# EAGLE board SparkFun_MOSFET_Power_Switch_and_Buck_Regulator_Low-Side-Panel (EAGLE 9.6.2), part 1 of 3
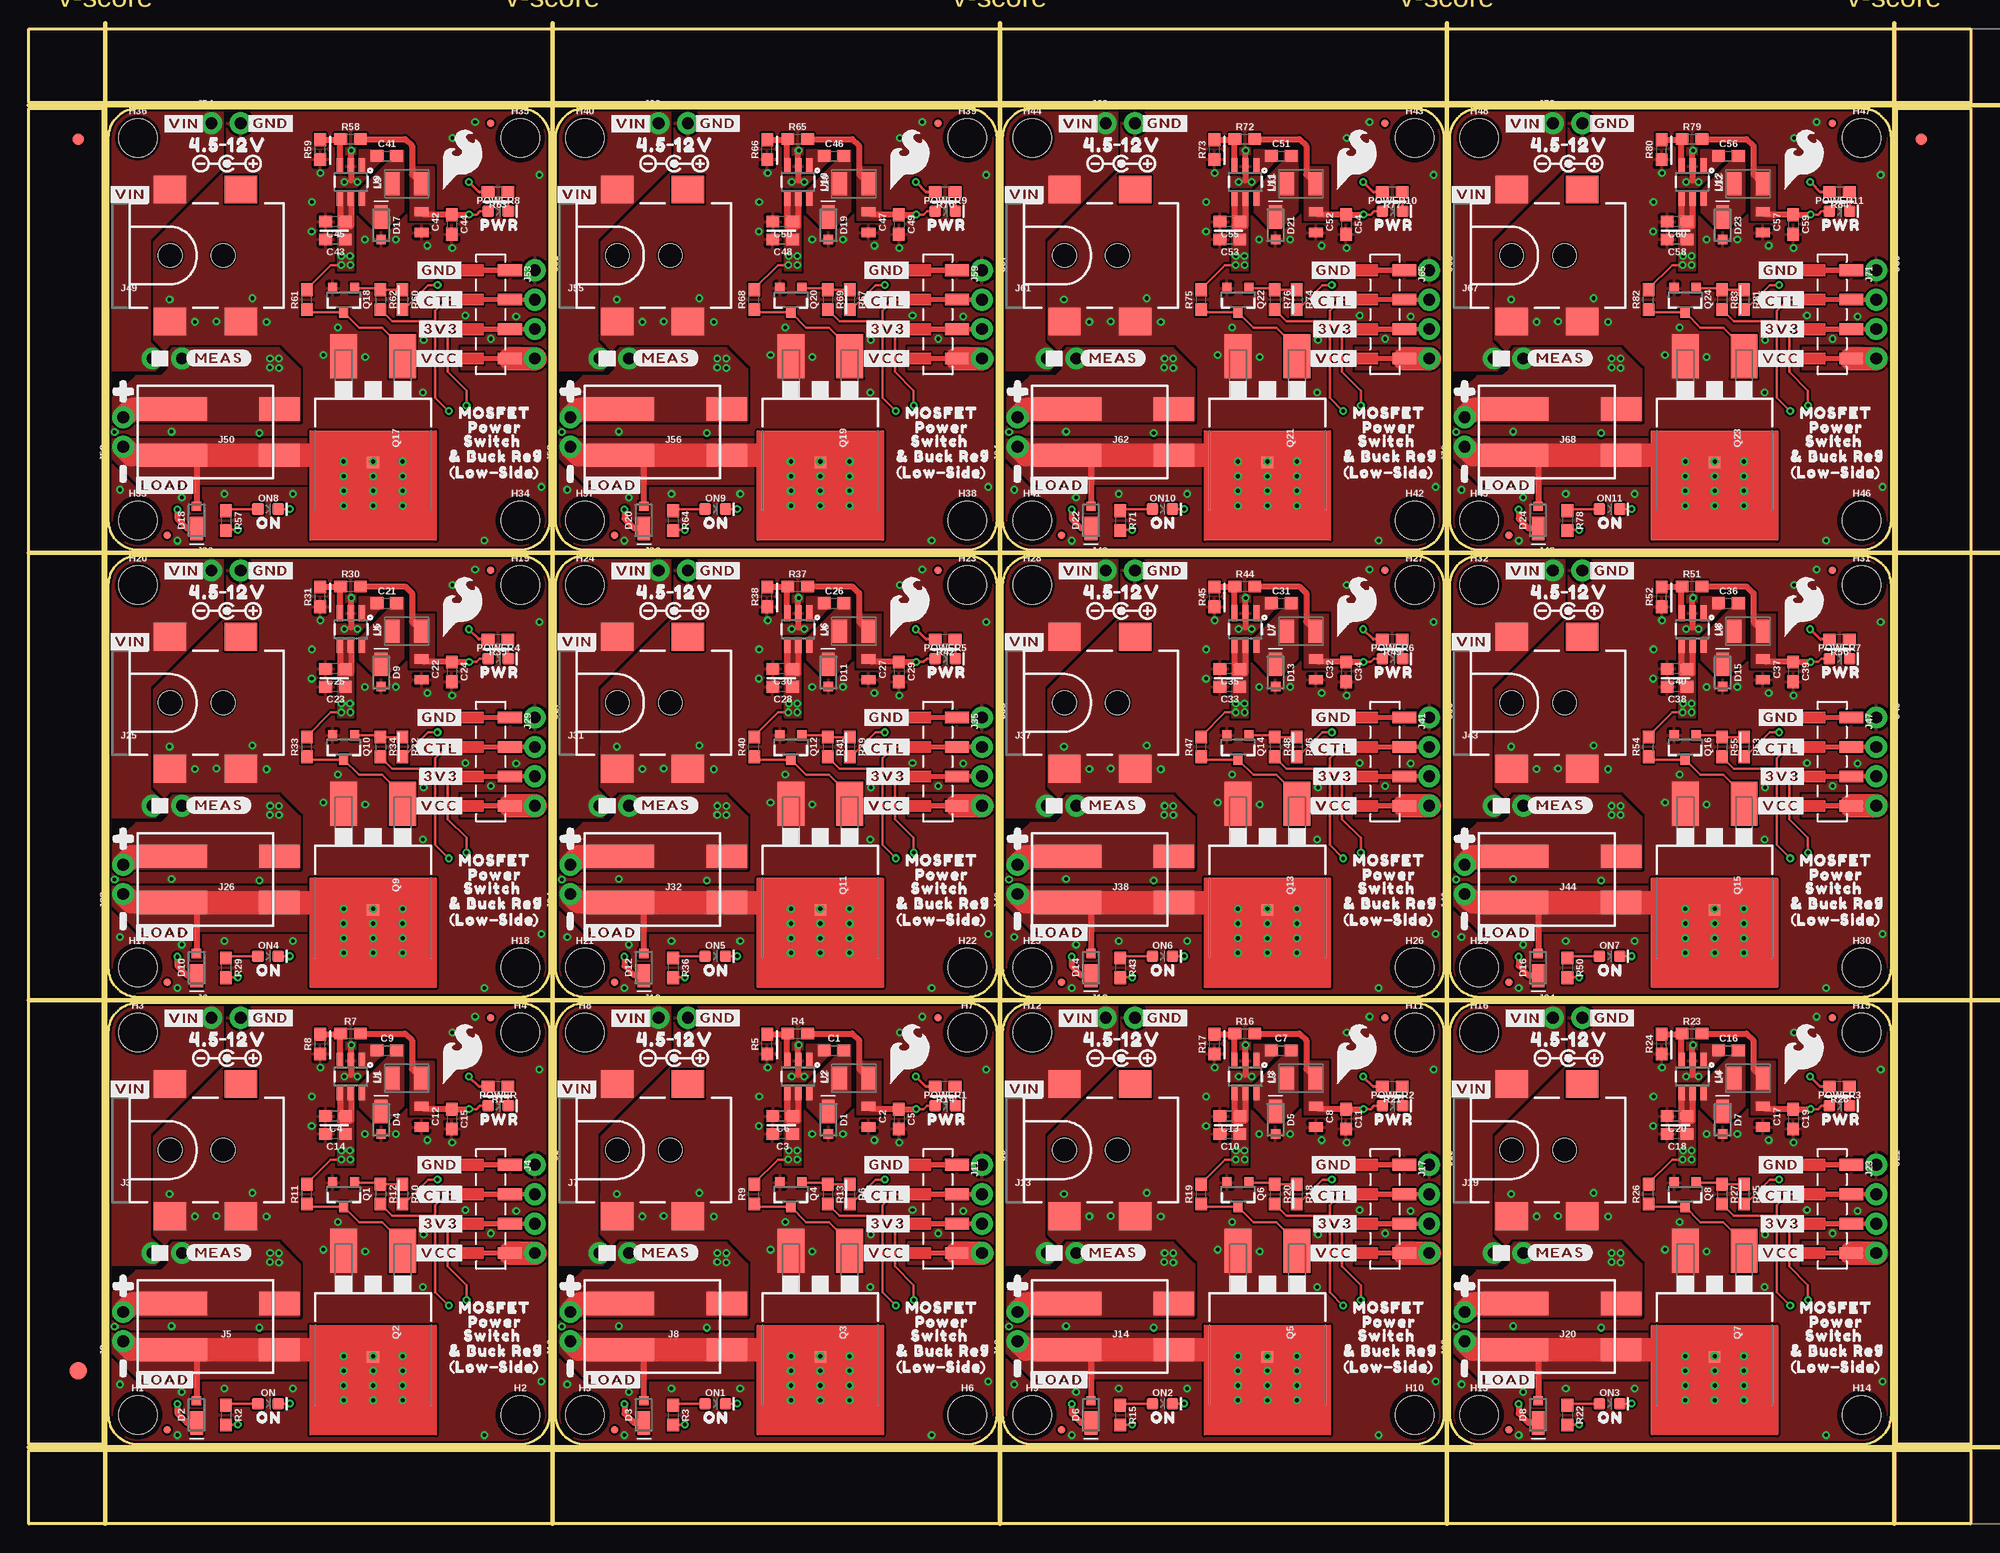
[diagram p0: board, top side]
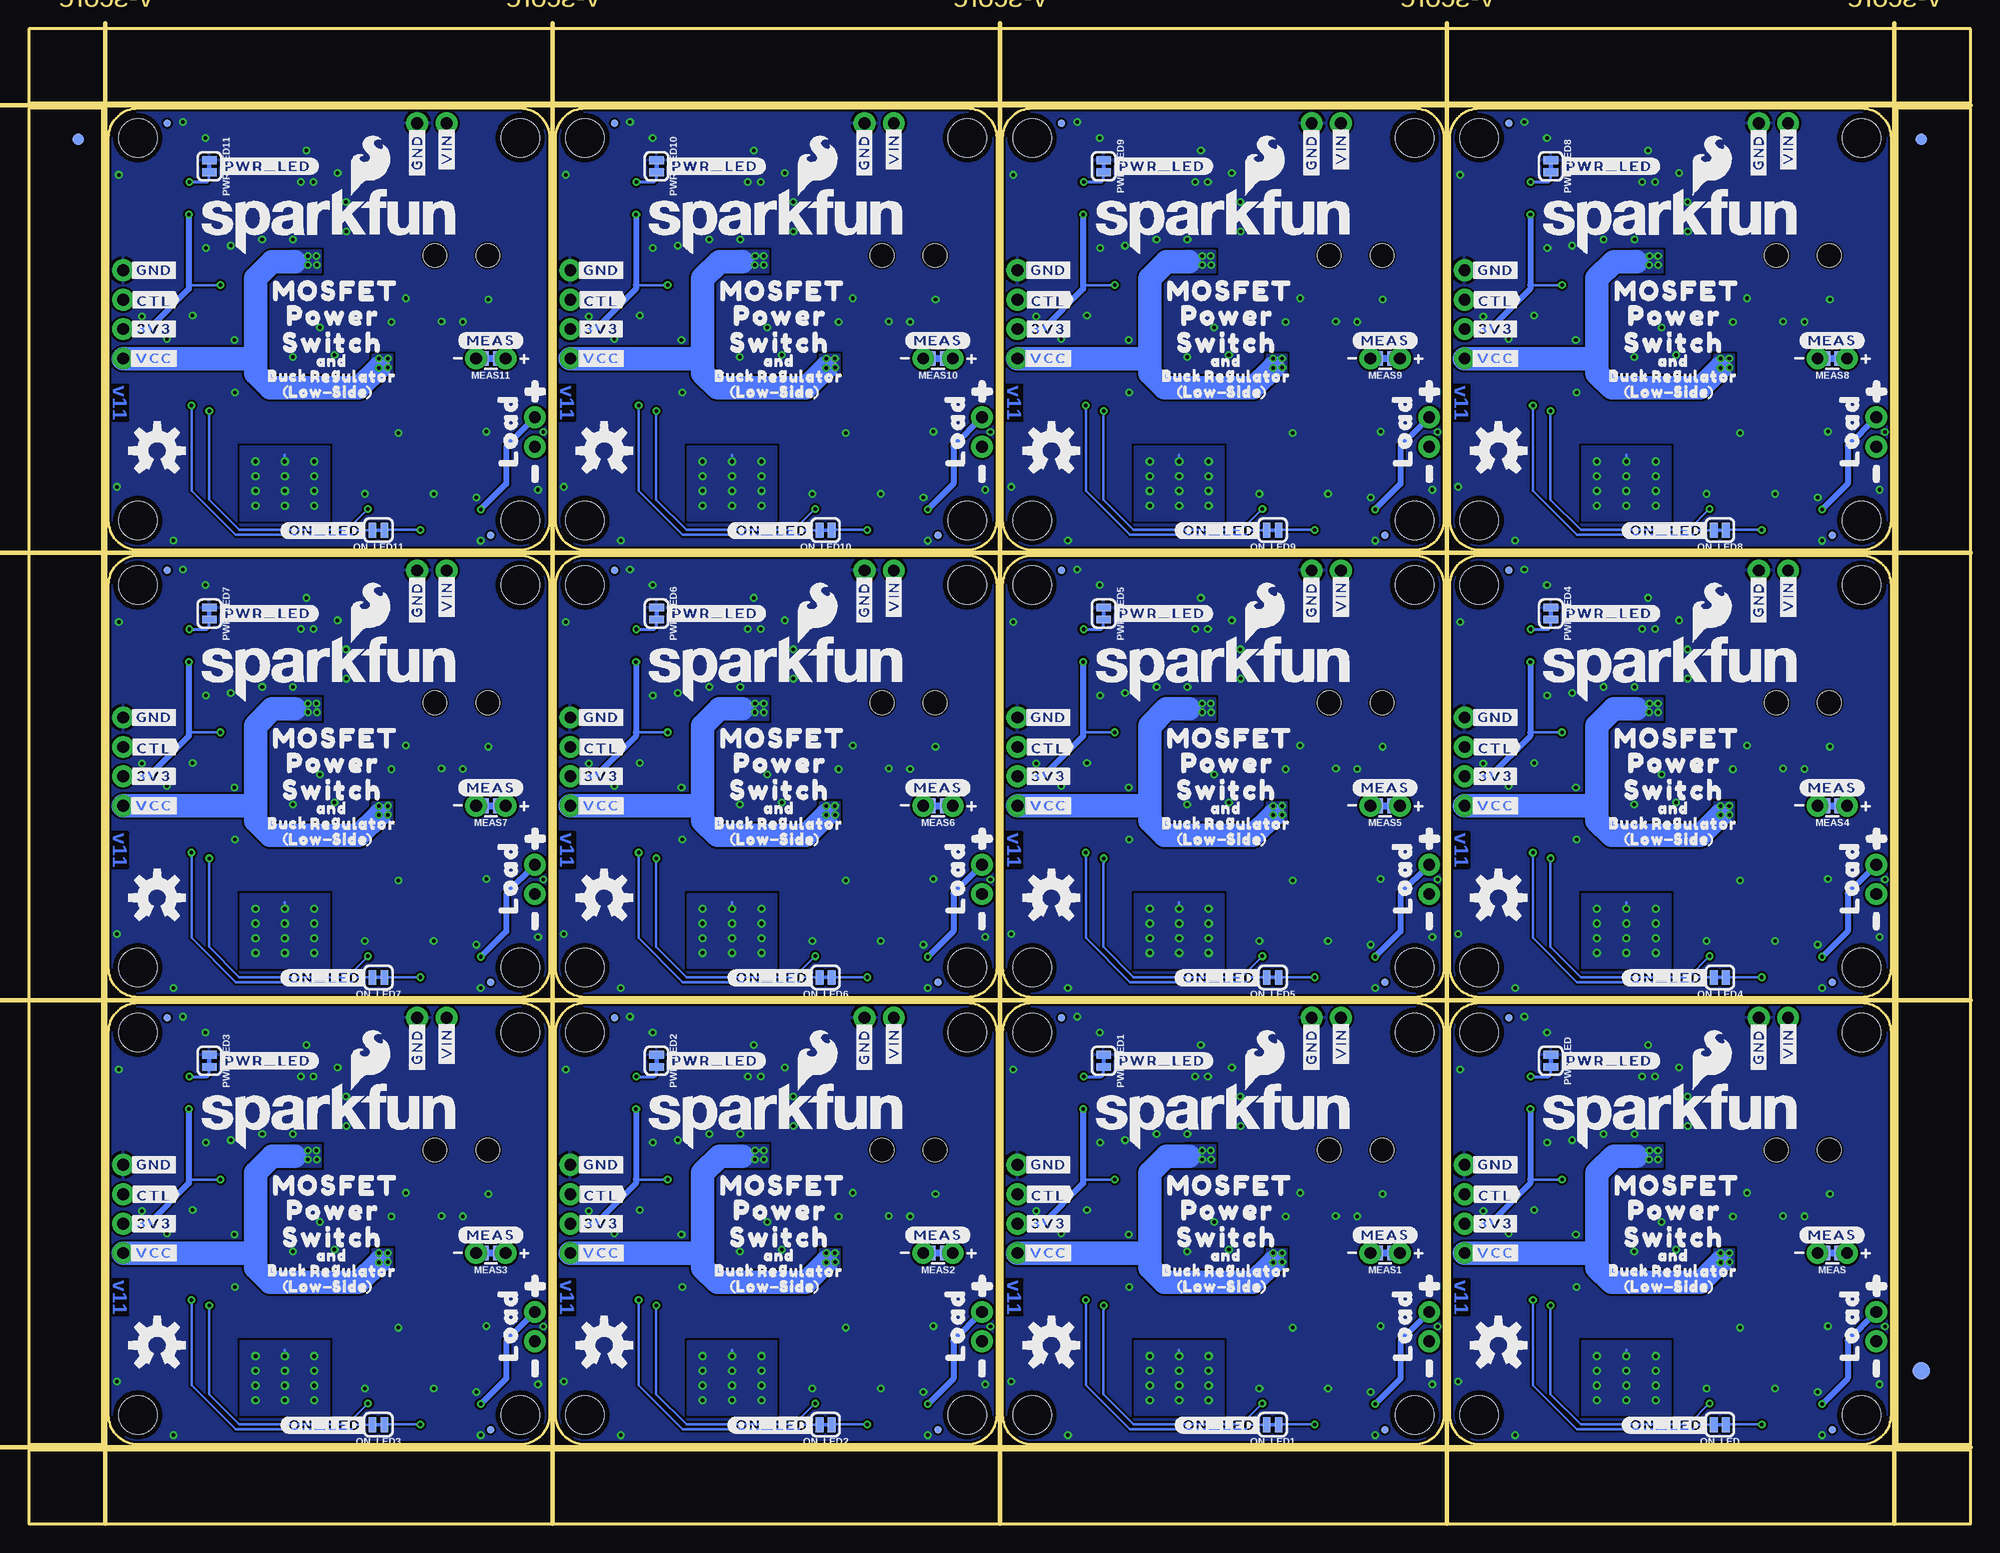
[diagram p1: board, bottom side, seen from below]

Size 167.64 x 129.03 mm. Coordinates in mm from the lower left corner, seen from the top.
Outline: 6.86,9.4 6.86,42.42 arc-90 9.4,44.96 42.42,44.96 arc-90 44.96,42.42 44.96,9.4 arc-90 42.42,6.86 9.4,6.86 arc-90 6.86,9.4
Outline: 45.47,9.4 45.47,42.42 arc-90 48.01,44.96 81.03,44.96 arc-90 83.57,42.42 83.57,9.4 arc-90 81.03,6.86 48.01,6.86 arc-90 45.47,9.4
Outline: 84.07,9.4 84.07,42.42 arc-90 86.61,44.96 119.63,44.96 arc-90 122.17,42.42 122.17,9.4 arc-90 119.63,6.86 86.61,6.86 arc-90 84.07,9.4
Outline: 122.68,9.4 122.68,42.42 arc-90 125.22,44.96 158.24,44.96 arc-90 160.78,42.42 160.78,9.4 arc-90 158.24,6.86 125.22,6.86 arc-90 122.68,9.4
Outline: 6.86,48.01 6.86,81.03 arc-90 9.4,83.57 42.42,83.57 arc-90 44.96,81.03 44.96,48.01 arc-90 42.42,45.47 9.4,45.47 arc-90 6.86,48.01
Outline: 45.47,48.01 45.47,81.03 arc-90 48.01,83.57 81.03,83.57 arc-90 83.57,81.03 83.57,48.01 arc-90 81.03,45.47 48.01,45.47 arc-90 45.47,48.01
Outline: 84.07,48.01 84.07,81.03 arc-90 86.61,83.57 119.63,83.57 arc-90 122.17,81.03 122.17,48.01 arc-90 119.63,45.47 86.61,45.47 arc-90 84.07,48.01
Outline: 122.68,48.01 122.68,81.03 arc-90 125.22,83.57 158.24,83.57 arc-90 160.78,81.03 160.78,48.01 arc-90 158.24,45.47 125.22,45.47 arc-90 122.68,48.01
Outline: 6.86,86.61 6.86,119.63 arc-90 9.4,122.17 42.42,122.17 arc-90 44.96,119.63 44.96,86.61 arc-90 42.42,84.07 9.4,84.07 arc-90 6.86,86.61
Outline: 45.47,86.61 45.47,119.63 arc-90 48.01,122.17 81.03,122.17 arc-90 83.57,119.63 83.57,86.61 arc-90 81.03,84.07 48.01,84.07 arc-90 45.47,86.61
Outline: 84.07,86.61 84.07,119.63 arc-90 86.61,122.17 119.63,122.17 arc-90 122.17,119.63 122.17,86.61 arc-90 119.63,84.07 86.61,84.07 arc-90 84.07,86.61
Outline: 122.68,86.61 122.68,119.63 arc-90 125.22,122.17 158.24,122.17 arc-90 160.78,119.63 160.78,86.61 arc-90 158.24,84.07 125.22,84.07 arc-90 122.68,86.61
Outline: 0,6.35 167.64,6.35 167.64,0 0,0 0,6.35
Outline: 161.29,122.17 167.64,122.17 167.64,6.86 161.29,6.86 161.29,122.17
Outline: 0,129.03 167.64,129.03 167.64,122.68 0,122.68 0,129.03
Outline: 0,122.17 6.35,122.17 6.35,6.86 0,6.86 0,122.17
Copper layers (1*16): Top 0.035mm / dielectric 1.5mm / Bottom 0.035mm
Design rules "SparkFun_MOSFET_Power_Switch_and_Buck_Regulator_Low-Side": minimum track width 7mil, minimum drill 0.3mm, track to track 7mil, track to pad 7mil, pad to pad 7mil, via to via 7mil, smd to smd 7mil, copper to edge 7mil, drill to drill 7mil, minimum pad ring 7mil, minimum via ring 7mil, stop-mask expansion 3mil, vias tented up to drill 25mil, thermal gap 10mil
Net classes: 1 power: width 0.254 mm
Milling: 9 lines

## Footprints (pad centres in the part's own frame; a part is rotated, then mirrored left to right if it is on the bottom)
0603 = smd 1.1 x 1: 1 -0.85,0; 2 0.85,0
0805 = smd 0.8 x 1.2: 1 -0.9,0; 2 0.9,0
DIODE-MICRO-SMP = smd 0.813 x 0.813: A 1.219,0 | smd 2.007 x 1.102: C -0.699,0
FIDUCIAL-1X2 = smd 1 x 1: 1 0,0
FIDUCIAL-1.5X3 = smd 1.5 x 1.5: 1 0,0
FIDUCIAL-MICRO = smd 0.635 x 0.635: 1 0,0
STAND-OFF = hole 3.302: 0,0
1X04_NO_SILK = drill 1.016 pad 1.88: 1 0,0; 2 2.54,0; 3 5.08,0; 4 7.62,0
1X02_NO_SILK = drill 1.016 pad 1.88: 1 0,0; 2 2.54,0
POWER_JACK_SMD = smd 2.8 x 2.4: GND 0,-5.7; P$4 6.1,-5.7; VIN0 0,5.7; VIN1 6.1,5.7 | hole 2.032: 0,0; 4.572,0
1X04_SMD_VERTICAL_COMBO = smd 1 x 2: 1 0,1.65; 2 2.54,1.65; 3 5.08,1.65; 4 7.62,1.652
1X02_POKEHOME = smd 3.5 x 2: P1 5.25,2; P2 5.25,-2 | smd 6 x 2: P3 -4,2; P4 -4,-2
INDUCTOR_LQH32 = smd 2 x 1.25: P$1 -0.07,1.205; P$2 -0.07,-1.295
COMBO-JUMPER_2_NC_TRACE = smd 0.635 x 1.27: 1 -0.508,0; 2 0.508,0 | drill 1.016 pad 1.88: 3 -1.27,0; 4 1.27,0
LED-0603 = smd 1 x 1: A -0.877,0; C 0.877,0
SMT-JUMPER_2_NC_TRACE_SILK = smd 0.66 x 1.27: 1 -0.521,0; 2 0.521,0
SOT23-3 = smd 0.8 x 0.9: 1 -0.95,-1; 2 0.95,-1; 3 0,1.1
TO-263/D2PAK = smd 2.32 x 3.81: 1 -2.54,-7.045; 3 2.54,-7.045 | smd 1 x 1: 2 0,2.125
SOT23-6 = smd 0.55 x 1.35: 1 -0.95,-1.375; 2 0,-1.375; 3 0.95,-1.375; 4 0.95,1.375; 5 0,1.375; 6 -0.95,1.375

## Placement (x,y rotation side)
C1  470nF  [0603]  69.51,40.85 0 top
C2  47uF/6.3V  [0805]  72.5,35.14 270 top
C3  0.1uF  [0603]  65.07,33.65 180 top
C4  4.7uF  [0603]  26.47,35.19 180 top
C5  0.1uF  [0603]  75.11,34.94 270 top
C6  4.7uF  [0603]  65.08,35.19 180 top
C7  470nF  [0603]  108.12,40.85 0 top
C8  47uF/6.3V  [0805]  111.11,35.14 270 top
C9  470nF  [0603]  30.91,40.85 0 top
C10  0.1uF  [0603]  103.68,33.65 180 top
C11  0.1uF  [0603]  113.72,34.94 270 top
C12  47uF/6.3V  [0805]  33.89,35.14 270 top
C13  4.7uF  [0603]  103.69,35.19 180 top
C14  0.1uF  [0603]  26.47,33.65 180 top
C15  0.1uF  [0603]  36.5,34.94 270 top
C16  470nF  [0603]  146.73,40.85 0 top
C17  47uF/6.3V  [0805]  149.72,35.14 270 top
C18  0.1uF  [0603]  142.29,33.65 180 top
C19  0.1uF  [0603]  152.33,34.94 270 top
C20  4.7uF  [0603]  142.29,35.19 180 top
C21  470nF  [0603]  30.91,79.46 0 top
C22  47uF/6.3V  [0805]  33.89,73.75 270 top
C23  0.1uF  [0603]  26.47,72.26 180 top
C24  0.1uF  [0603]  36.5,73.54 270 top
C25  4.7uF  [0603]  26.47,73.8 180 top
C26  470nF  [0603]  69.51,79.46 0 top
C27  47uF/6.3V  [0805]  72.5,73.75 270 top
C28  0.1uF  [0603]  65.07,72.26 180 top
C29  0.1uF  [0603]  75.11,73.54 270 top
C30  4.7uF  [0603]  65.08,73.8 180 top
C31  470nF  [0603]  108.12,79.46 0 top
C32  47uF/6.3V  [0805]  111.11,73.75 270 top
C33  0.1uF  [0603]  103.68,72.26 180 top
C34  0.1uF  [0603]  113.72,73.54 270 top
C35  4.7uF  [0603]  103.69,73.8 180 top
C36  470nF  [0603]  146.73,79.46 0 top
C37  47uF/6.3V  [0805]  149.72,73.75 270 top
C38  0.1uF  [0603]  142.29,72.26 180 top
C39  0.1uF  [0603]  152.33,73.54 270 top
C40  4.7uF  [0603]  142.29,73.8 180 top
C41  470nF  [0603]  30.91,118.06 0 top
C42  47uF/6.3V  [0805]  33.89,112.36 270 top
C43  0.1uF  [0603]  26.47,110.86 180 top
C44  0.1uF  [0603]  36.5,112.15 270 top
C45  4.7uF  [0603]  26.47,112.41 180 top
C46  470nF  [0603]  69.51,118.06 0 top
C47  47uF/6.3V  [0805]  72.5,112.36 270 top
C48  0.1uF  [0603]  65.07,110.86 180 top
C49  0.1uF  [0603]  75.11,112.15 270 top
C50  4.7uF  [0603]  65.08,112.41 180 top
C51  470nF  [0603]  108.12,118.06 0 top
C52  47uF/6.3V  [0805]  111.11,112.36 270 top
C53  0.1uF  [0603]  103.68,110.86 180 top
C54  0.1uF  [0603]  113.72,112.15 270 top
C55  4.7uF  [0603]  103.69,112.41 180 top
C56  470nF  [0603]  146.73,118.06 0 top
C57  47uF/6.3V  [0805]  149.72,112.36 270 top
C58  0.1uF  [0603]  142.29,110.86 180 top
C59  0.1uF  [0603]  152.33,112.15 270 top
C60  4.7uF  [0603]  142.29,112.41 180 top
D1  1A/60V/520mV  [DIODE-MICRO-SMP]  69.02,34.88 270 top
D2  1A/60V/520mV  [DIODE-MICRO-SMP]  14.48,9.4 90 top
D3  1A/60V/520mV  [DIODE-MICRO-SMP]  53.09,9.4 90 top
D4  1A/60V/520mV  [DIODE-MICRO-SMP]  30.41,34.88 270 top
D5  1A/60V/520mV  [DIODE-MICRO-SMP]  107.63,34.88 270 top
D6  1A/60V/520mV  [DIODE-MICRO-SMP]  91.69,9.4 90 top
D7  1A/60V/520mV  [DIODE-MICRO-SMP]  146.24,34.88 270 top
D8  1A/60V/520mV  [DIODE-MICRO-SMP]  130.3,9.4 90 top
D9  1A/60V/520mV  [DIODE-MICRO-SMP]  30.41,73.49 270 top
D10  1A/60V/520mV  [DIODE-MICRO-SMP]  14.48,48.01 90 top
D11  1A/60V/520mV  [DIODE-MICRO-SMP]  69.02,73.49 270 top
D12  1A/60V/520mV  [DIODE-MICRO-SMP]  53.09,48.01 90 top
D13  1A/60V/520mV  [DIODE-MICRO-SMP]  107.63,73.49 270 top
D14  1A/60V/520mV  [DIODE-MICRO-SMP]  91.69,48.01 90 top
D15  1A/60V/520mV  [DIODE-MICRO-SMP]  146.24,73.49 270 top
D16  1A/60V/520mV  [DIODE-MICRO-SMP]  130.3,48.01 90 top
D17  1A/60V/520mV  [DIODE-MICRO-SMP]  30.41,112.1 270 top
D18  1A/60V/520mV  [DIODE-MICRO-SMP]  14.48,86.61 90 top
D19  1A/60V/520mV  [DIODE-MICRO-SMP]  69.02,112.1 270 top
D20  1A/60V/520mV  [DIODE-MICRO-SMP]  53.09,86.61 90 top
D21  1A/60V/520mV  [DIODE-MICRO-SMP]  107.63,112.1 270 top
D22  1A/60V/520mV  [DIODE-MICRO-SMP]  91.69,86.61 90 top
D23  1A/60V/520mV  [DIODE-MICRO-SMP]  146.24,112.1 270 top
D24  1A/60V/520mV  [DIODE-MICRO-SMP]  130.3,86.61 90 top
E$1  [FIDUCIAL-1X2]  4.23,119.51 0 top
E$2  [FIDUCIAL-1X2]  4.23,119.51 0 bottom
E$3  [FIDUCIAL-1X2]  163.41,119.51 0 top
E$4  [FIDUCIAL-1X2]  163.41,119.51 0 bottom
E$5  [FIDUCIAL-1.5X3]  4.23,13.21 0 top
E$6  [FIDUCIAL-1.5X3]  4.23,13.21 0 bottom
FD1  FIDUCIALUFIDUCIAL  [FIDUCIAL-MICRO]  11.94,8.13 0 bottom
FD2  FIDUCIALUFIDUCIAL  [FIDUCIAL-MICRO]  11.94,8.13 0 top
FD3  FIDUCIALUFIDUCIAL  [FIDUCIAL-MICRO]  39.88,43.69 0 bottom
FD4  FIDUCIALUFIDUCIAL  [FIDUCIAL-MICRO]  39.88,43.69 0 top
FD5  FIDUCIALUFIDUCIAL  [FIDUCIAL-MICRO]  50.55,8.13 0 bottom
FD6  FIDUCIALUFIDUCIAL  [FIDUCIAL-MICRO]  50.55,8.13 0 top
FD7  FIDUCIALUFIDUCIAL  [FIDUCIAL-MICRO]  78.49,43.69 0 bottom
FD8  FIDUCIALUFIDUCIAL  [FIDUCIAL-MICRO]  78.49,43.69 0 top
FD9  FIDUCIALUFIDUCIAL  [FIDUCIAL-MICRO]  89.15,8.13 0 bottom
FD10  FIDUCIALUFIDUCIAL  [FIDUCIAL-MICRO]  89.15,8.13 0 top
FD11  FIDUCIALUFIDUCIAL  [FIDUCIAL-MICRO]  117.09,43.69 0 bottom
FD12  FIDUCIALUFIDUCIAL  [FIDUCIAL-MICRO]  117.09,43.69 0 top
FD13  FIDUCIALUFIDUCIAL  [FIDUCIAL-MICRO]  127.76,8.13 0 bottom
FD14  FIDUCIALUFIDUCIAL  [FIDUCIAL-MICRO]  127.76,8.13 0 top
FD15  FIDUCIALUFIDUCIAL  [FIDUCIAL-MICRO]  155.7,43.69 0 bottom
FD16  FIDUCIALUFIDUCIAL  [FIDUCIAL-MICRO]  155.7,43.69 0 top
FD17  FIDUCIALUFIDUCIAL  [FIDUCIAL-MICRO]  11.94,46.74 0 bottom
FD18  FIDUCIALUFIDUCIAL  [FIDUCIAL-MICRO]  11.94,46.74 0 top
FD19  FIDUCIALUFIDUCIAL  [FIDUCIAL-MICRO]  39.88,82.3 0 bottom
FD20  FIDUCIALUFIDUCIAL  [FIDUCIAL-MICRO]  39.88,82.3 0 top
FD21  FIDUCIALUFIDUCIAL  [FIDUCIAL-MICRO]  50.55,46.74 0 bottom
FD22  FIDUCIALUFIDUCIAL  [FIDUCIAL-MICRO]  50.55,46.74 0 top
FD23  FIDUCIALUFIDUCIAL  [FIDUCIAL-MICRO]  78.49,82.3 0 bottom
FD24  FIDUCIALUFIDUCIAL  [FIDUCIAL-MICRO]  78.49,82.3 0 top
FD25  FIDUCIALUFIDUCIAL  [FIDUCIAL-MICRO]  89.15,46.74 0 bottom
FD26  FIDUCIALUFIDUCIAL  [FIDUCIAL-MICRO]  89.15,46.74 0 top
FD27  FIDUCIALUFIDUCIAL  [FIDUCIAL-MICRO]  117.09,82.3 0 bottom
FD28  FIDUCIALUFIDUCIAL  [FIDUCIAL-MICRO]  117.09,82.3 0 top
FD29  FIDUCIALUFIDUCIAL  [FIDUCIAL-MICRO]  127.76,46.74 0 bottom
FD30  FIDUCIALUFIDUCIAL  [FIDUCIAL-MICRO]  127.76,46.74 0 top
FD31  FIDUCIALUFIDUCIAL  [FIDUCIAL-MICRO]  155.7,82.3 0 bottom
FD32  FIDUCIALUFIDUCIAL  [FIDUCIAL-MICRO]  155.7,82.3 0 top
FD33  FIDUCIALUFIDUCIAL  [FIDUCIAL-MICRO]  11.94,85.34 0 bottom
FD34  FIDUCIALUFIDUCIAL  [FIDUCIAL-MICRO]  11.94,85.34 0 top
FD35  FIDUCIALUFIDUCIAL  [FIDUCIAL-MICRO]  39.88,120.9 0 bottom
FD36  FIDUCIALUFIDUCIAL  [FIDUCIAL-MICRO]  39.88,120.9 0 top
FD37  FIDUCIALUFIDUCIAL  [FIDUCIAL-MICRO]  50.55,85.34 0 bottom
FD38  FIDUCIALUFIDUCIAL  [FIDUCIAL-MICRO]  50.55,85.34 0 top
FD39  FIDUCIALUFIDUCIAL  [FIDUCIAL-MICRO]  78.49,120.9 0 bottom
FD40  FIDUCIALUFIDUCIAL  [FIDUCIAL-MICRO]  78.49,120.9 0 top
FD41  FIDUCIALUFIDUCIAL  [FIDUCIAL-MICRO]  89.15,85.34 0 bottom
FD42  FIDUCIALUFIDUCIAL  [FIDUCIAL-MICRO]  89.15,85.34 0 top
FD43  FIDUCIALUFIDUCIAL  [FIDUCIAL-MICRO]  117.09,120.9 0 bottom
FD44  FIDUCIALUFIDUCIAL  [FIDUCIAL-MICRO]  117.09,120.9 0 top
FD45  FIDUCIALUFIDUCIAL  [FIDUCIAL-MICRO]  127.76,85.34 0 bottom
FD46  FIDUCIALUFIDUCIAL  [FIDUCIAL-MICRO]  127.76,85.34 0 top
FD47  FIDUCIALUFIDUCIAL  [FIDUCIAL-MICRO]  155.7,120.9 0 bottom
FD48  FIDUCIALUFIDUCIAL  [FIDUCIAL-MICRO]  155.7,120.9 0 top
H1  STAND-OFF  [STAND-OFF]  9.4,9.4 0 top
H2  STAND-OFF  [STAND-OFF]  42.42,9.4 0 top
H3  STAND-OFF  [STAND-OFF]  9.4,42.42 0 top
H4  STAND-OFF  [STAND-OFF]  42.42,42.42 0 top
H5  STAND-OFF  [STAND-OFF]  48.01,9.4 0 top
H6  STAND-OFF  [STAND-OFF]  81.03,9.4 0 top
H7  STAND-OFF  [STAND-OFF]  81.03,42.42 0 top
H8  STAND-OFF  [STAND-OFF]  48.01,42.42 0 top
H9  STAND-OFF  [STAND-OFF]  86.61,9.4 0 top
H10  STAND-OFF  [STAND-OFF]  119.63,9.4 0 top
H11  STAND-OFF  [STAND-OFF]  119.63,42.42 0 top
H12  STAND-OFF  [STAND-OFF]  86.61,42.42 0 top
H13  STAND-OFF  [STAND-OFF]  125.22,9.4 0 top
H14  STAND-OFF  [STAND-OFF]  158.24,9.4 0 top
H15  STAND-OFF  [STAND-OFF]  158.24,42.42 0 top
H16  STAND-OFF  [STAND-OFF]  125.22,42.42 0 top
H17  STAND-OFF  [STAND-OFF]  9.4,48.01 0 top
H18  STAND-OFF  [STAND-OFF]  42.42,48.01 0 top
H19  STAND-OFF  [STAND-OFF]  42.42,81.03 0 top
H20  STAND-OFF  [STAND-OFF]  9.4,81.03 0 top
H21  STAND-OFF  [STAND-OFF]  48.01,48.01 0 top
H22  STAND-OFF  [STAND-OFF]  81.03,48.01 0 top
H23  STAND-OFF  [STAND-OFF]  81.03,81.03 0 top
H24  STAND-OFF  [STAND-OFF]  48.01,81.03 0 top
H25  STAND-OFF  [STAND-OFF]  86.61,48.01 0 top
H26  STAND-OFF  [STAND-OFF]  119.63,48.01 0 top
H27  STAND-OFF  [STAND-OFF]  119.63,81.03 0 top
H28  STAND-OFF  [STAND-OFF]  86.61,81.03 0 top
H29  STAND-OFF  [STAND-OFF]  125.22,48.01 0 top
H30  STAND-OFF  [STAND-OFF]  158.24,48.01 0 top
H31  STAND-OFF  [STAND-OFF]  158.24,81.03 0 top
H32  STAND-OFF  [STAND-OFF]  125.22,81.03 0 top
H33  STAND-OFF  [STAND-OFF]  9.4,86.61 0 top
H34  STAND-OFF  [STAND-OFF]  42.42,86.61 0 top
H35  STAND-OFF  [STAND-OFF]  42.42,119.63 0 top
H36  STAND-OFF  [STAND-OFF]  9.4,119.63 0 top
H37  STAND-OFF  [STAND-OFF]  48.01,86.61 0 top
H38  STAND-OFF  [STAND-OFF]  81.03,86.61 0 top
H39  STAND-OFF  [STAND-OFF]  81.03,119.63 0 top
H40  STAND-OFF  [STAND-OFF]  48.01,119.63 0 top
H41  STAND-OFF  [STAND-OFF]  86.61,86.61 0 top
H42  STAND-OFF  [STAND-OFF]  119.63,86.61 0 top
H43  STAND-OFF  [STAND-OFF]  119.63,119.63 0 top
H44  STAND-OFF  [STAND-OFF]  86.61,119.63 0 top
H45  STAND-OFF  [STAND-OFF]  125.22,86.61 0 top
H46  STAND-OFF  [STAND-OFF]  158.24,86.61 0 top
H47  STAND-OFF  [STAND-OFF]  158.24,119.63 0 top
H48  STAND-OFF  [STAND-OFF]  125.22,119.63 0 top
J1  PTH  [1X04_NO_SILK]  43.69,30.99 270 top
J2  [1X02_NO_SILK]  8.13,15.75 90 top
J3  5.5x2.1mm Barrel  [POWER_JACK_SMD]  12.19,32.26 0 top
J4  SMD  [1X04_SMD_VERTICAL_COMBO]  39.88,30.99 270 top
J5  [1X02_POKEHOME]  16.38,17.02 0 top
J6  [1X02_NO_SILK]  15.75,43.69 0 top
J7  5.5x2.1mm Barrel  [POWER_JACK_SMD]  50.8,32.26 0 top
J8  [1X02_POKEHOME]  54.99,17.02 0 top
J9  PTH  [1X04_NO_SILK]  82.3,30.99 270 top
J10  [1X02_NO_SILK]  46.74,15.75 90 top
J11  SMD  [1X04_SMD_VERTICAL_COMBO]  78.49,30.99 270 top
J12  [1X02_NO_SILK]  54.36,43.69 0 top
J13  5.5x2.1mm Barrel  [POWER_JACK_SMD]  89.41,32.26 0 top
J14  [1X02_POKEHOME]  93.6,17.02 0 top
J15  PTH  [1X04_NO_SILK]  120.9,30.99 270 top
J16  [1X02_NO_SILK]  85.34,15.75 90 top
J17  SMD  [1X04_SMD_VERTICAL_COMBO]  117.09,30.99 270 top
J18  [1X02_NO_SILK]  92.96,43.69 0 top
J19  5.5x2.1mm Barrel  [POWER_JACK_SMD]  128.02,32.26 0 top
J20  [1X02_POKEHOME]  132.21,17.02 0 top
J21  PTH  [1X04_NO_SILK]  159.51,30.99 270 top
J22  [1X02_NO_SILK]  123.95,15.75 90 top
J23  SMD  [1X04_SMD_VERTICAL_COMBO]  155.7,30.99 270 top
J24  [1X02_NO_SILK]  131.57,43.69 0 top
J25  5.5x2.1mm Barrel  [POWER_JACK_SMD]  12.19,70.87 0 top
J26  [1X02_POKEHOME]  16.38,55.63 0 top
J27  PTH  [1X04_NO_SILK]  43.69,69.6 270 top
J28  [1X02_NO_SILK]  8.13,54.36 90 top
J29  SMD  [1X04_SMD_VERTICAL_COMBO]  39.88,69.6 270 top
J30  [1X02_NO_SILK]  15.75,82.3 0 top
J31  5.5x2.1mm Barrel  [POWER_JACK_SMD]  50.8,70.87 0 top
J32  [1X02_POKEHOME]  54.99,55.63 0 top
J33  PTH  [1X04_NO_SILK]  82.3,69.6 270 top
J34  [1X02_NO_SILK]  46.74,54.36 90 top
J35  SMD  [1X04_SMD_VERTICAL_COMBO]  78.49,69.6 270 top
J36  [1X02_NO_SILK]  54.36,82.3 0 top
J37  5.5x2.1mm Barrel  [POWER_JACK_SMD]  89.41,70.87 0 top
J38  [1X02_POKEHOME]  93.6,55.63 0 top
J39  PTH  [1X04_NO_SILK]  120.9,69.6 270 top
J40  [1X02_NO_SILK]  85.34,54.36 90 top
J41  SMD  [1X04_SMD_VERTICAL_COMBO]  117.09,69.6 270 top
J42  [1X02_NO_SILK]  92.96,82.3 0 top
J43  5.5x2.1mm Barrel  [POWER_JACK_SMD]  128.02,70.87 0 top
J44  [1X02_POKEHOME]  132.21,55.63 0 top
J45  PTH  [1X04_NO_SILK]  159.51,69.6 270 top
J46  [1X02_NO_SILK]  123.95,54.36 90 top
J47  SMD  [1X04_SMD_VERTICAL_COMBO]  155.7,69.6 270 top
J48  [1X02_NO_SILK]  131.57,82.3 0 top
J49  5.5x2.1mm Barrel  [POWER_JACK_SMD]  12.19,109.47 0 top
J50  [1X02_POKEHOME]  16.38,94.23 0 top
J51  PTH  [1X04_NO_SILK]  43.69,108.2 270 top
J52  [1X02_NO_SILK]  8.13,92.96 90 top
J53  SMD  [1X04_SMD_VERTICAL_COMBO]  39.88,108.2 270 top
J54  [1X02_NO_SILK]  15.75,120.9 0 top
J55  5.5x2.1mm Barrel  [POWER_JACK_SMD]  50.8,109.47 0 top
J56  [1X02_POKEHOME]  54.99,94.23 0 top
J57  PTH  [1X04_NO_SILK]  82.3,108.2 270 top
J58  [1X02_NO_SILK]  46.74,92.96 90 top
J59  SMD  [1X04_SMD_VERTICAL_COMBO]  78.49,108.2 270 top
J60  [1X02_NO_SILK]  54.36,120.9 0 top
J61  5.5x2.1mm Barrel  [POWER_JACK_SMD]  89.41,109.47 0 top
J62  [1X02_POKEHOME]  93.6,94.23 0 top
J63  PTH  [1X04_NO_SILK]  120.9,108.2 270 top
J64  [1X02_NO_SILK]  85.34,92.96 90 top
J65  SMD  [1X04_SMD_VERTICAL_COMBO]  117.09,108.2 270 top
J66  [1X02_NO_SILK]  92.96,120.9 0 top
J67  5.5x2.1mm Barrel  [POWER_JACK_SMD]  128.02,109.47 0 top
J68  [1X02_POKEHOME]  132.21,94.23 0 top
J69  PTH  [1X04_NO_SILK]  159.51,108.2 270 top
J70  [1X02_NO_SILK]  123.95,92.96 90 top
J71  SMD  [1X04_SMD_VERTICAL_COMBO]  155.7,108.2 270 top
J72  [1X02_NO_SILK]  131.57,120.9 0 top
L1  15uH  [INDUCTOR_LQH32]  32.6,38.51 90 top
L2  15uH  [INDUCTOR_LQH32]  71.21,38.51 90 top
L3  15uH  [INDUCTOR_LQH32]  109.82,38.51 90 top
L4  15uH  [INDUCTOR_LQH32]  148.43,38.51 90 top
L5  15uH  [INDUCTOR_LQH32]  32.6,77.12 90 top
L6  15uH  [INDUCTOR_LQH32]  71.21,77.12 90 top
L7  15uH  [INDUCTOR_LQH32]  109.82,77.12 90 top
L8  15uH  [INDUCTOR_LQH32]  148.43,77.12 90 top
L9  15uH  [INDUCTOR_LQH32]  32.6,115.73 90 top
L10  15uH  [INDUCTOR_LQH32]  71.21,115.73 90 top
L11  15uH  [INDUCTOR_LQH32]  109.82,115.73 90 top
L12  15uH  [INDUCTOR_LQH32]  148.43,115.73 90 top
LOGO1  OSHW-LOGOM  [OSHW-LOGO-M]  40.76,15.42 0 bottom
LOGO2  SFE_LOGO_NAME_FLAME.2_INCH  [SFE_LOGO_NAME_FLAME_.2]  25.89,35.21 0 bottom
LOGO3  OSHW-LOGOM  [OSHW-LOGO-M]  79.36,15.42 0 bottom
LOGO4  SFE_LOGO_NAME_FLAME.2_INCH  [SFE_LOGO_NAME_FLAME_.2]  64.49,35.21 0 bottom
LOGO5  OSHW-LOGOM  [OSHW-LOGO-M]  117.97,15.42 0 bottom
LOGO6  SFE_LOGO_NAME_FLAME.2_INCH  [SFE_LOGO_NAME_FLAME_.2]  103.1,35.21 0 bottom
LOGO7  OSHW-LOGOM  [OSHW-LOGO-M]  156.58,15.42 0 bottom
LOGO8  SFE_LOGO_NAME_FLAME.2_INCH  [SFE_LOGO_NAME_FLAME_.2]  141.71,35.21 0 bottom
LOGO9  OSHW-LOGOM  [OSHW-LOGO-M]  40.76,54.02 0 bottom
LOGO10  SFE_LOGO_NAME_FLAME.2_INCH  [SFE_LOGO_NAME_FLAME_.2]  25.89,73.82 0 bottom
LOGO11  OSHW-LOGOM  [OSHW-LOGO-M]  79.36,54.02 0 bottom
LOGO12  SFE_LOGO_NAME_FLAME.2_INCH  [SFE_LOGO_NAME_FLAME_.2]  64.49,73.82 0 bottom
LOGO13  OSHW-LOGOM  [OSHW-LOGO-M]  117.97,54.02 0 bottom
LOGO14  SFE_LOGO_NAME_FLAME.2_INCH  [SFE_LOGO_NAME_FLAME_.2]  103.1,73.82 0 bottom
LOGO15  OSHW-LOGOM  [OSHW-LOGO-M]  156.58,54.02 0 bottom
LOGO16  SFE_LOGO_NAME_FLAME.2_INCH  [SFE_LOGO_NAME_FLAME_.2]  141.71,73.82 0 bottom
LOGO17  OSHW-LOGOM  [OSHW-LOGO-M]  40.76,92.63 0 bottom
LOGO18  SFE_LOGO_NAME_FLAME.2_INCH  [SFE_LOGO_NAME_FLAME_.2]  25.89,112.43 0 bottom
LOGO19  OSHW-LOGOM  [OSHW-LOGO-M]  79.36,92.63 0 bottom
LOGO20  SFE_LOGO_NAME_FLAME.2_INCH  [SFE_LOGO_NAME_FLAME_.2]  64.49,112.43 0 bottom
LOGO21  OSHW-LOGOM  [OSHW-LOGO-M]  117.97,92.63 0 bottom
LOGO22  SFE_LOGO_NAME_FLAME.2_INCH  [SFE_LOGO_NAME_FLAME_.2]  103.1,112.43 0 bottom
LOGO23  OSHW-LOGOM  [OSHW-LOGO-M]  156.58,92.63 0 bottom
LOGO24  SFE_LOGO_NAME_FLAME.2_INCH  [SFE_LOGO_NAME_FLAME_.2]  141.71,112.43 0 bottom
MEAS  JUMPER-COMBO_2_NC_TRACE  [COMBO-JUMPER_2_NC_TRACE]  11.94,23.37 180 bottom
MEAS1  JUMPER-COMBO_2_NC_TRACE  [COMBO-JUMPER_2_NC_TRACE]  50.55,23.37 180 bottom
MEAS2  JUMPER-COMBO_2_NC_TRACE  [COMBO-JUMPER_2_NC_TRACE]  89.15,23.37 180 bottom
MEAS3  JUMPER-COMBO_2_NC_TRACE  [COMBO-JUMPER_2_NC_TRACE]  127.76,23.37 180 bottom
MEAS4  JUMPER-COMBO_2_NC_TRACE  [COMBO-JUMPER_2_NC_TRACE]  11.94,61.98 180 bottom
MEAS5  JUMPER-COMBO_2_NC_TRACE  [COMBO-JUMPER_2_NC_TRACE]  50.55,61.98 180 bottom
MEAS6  JUMPER-COMBO_2_NC_TRACE  [COMBO-JUMPER_2_NC_TRACE]  89.15,61.98 180 bottom
MEAS7  JUMPER-COMBO_2_NC_TRACE  [COMBO-JUMPER_2_NC_TRACE]  127.76,61.98 180 bottom
MEAS8  JUMPER-COMBO_2_NC_TRACE  [COMBO-JUMPER_2_NC_TRACE]  11.94,100.58 180 bottom
MEAS9  JUMPER-COMBO_2_NC_TRACE  [COMBO-JUMPER_2_NC_TRACE]  50.55,100.58 180 bottom
MEAS10  JUMPER-COMBO_2_NC_TRACE  [COMBO-JUMPER_2_NC_TRACE]  89.15,100.58 180 bottom
MEAS11  JUMPER-COMBO_2_NC_TRACE  [COMBO-JUMPER_2_NC_TRACE]  127.76,100.58 180 bottom
ON  Red  [LED-0603]  20.65,10.38 0 top
ON1  Red  [LED-0603]  59.26,10.38 0 top
ON2  Red  [LED-0603]  97.87,10.38 0 top
ON3  Red  [LED-0603]  136.47,10.38 0 top
ON4  Red  [LED-0603]  20.65,48.98 0 top
ON5  Red  [LED-0603]  59.26,48.98 0 top
ON6  Red  [LED-0603]  97.87,48.98 0 top
ON7  Red  [LED-0603]  136.47,48.98 0 top
ON8  Red  [LED-0603]  20.65,87.59 0 top
ON9  Red  [LED-0603]  59.26,87.59 0 top
ON10  Red  [LED-0603]  97.87,87.59 0 top
ON11  Red  [LED-0603]  136.47,87.59 0 top
ON_LED  [SMT-JUMPER_2_NC_TRACE_SILK]  21.65,8.55 180 bottom
ON_LED1  [SMT-JUMPER_2_NC_TRACE_SILK]  60.25,8.55 180 bottom
ON_LED2  [SMT-JUMPER_2_NC_TRACE_SILK]  98.86,8.55 180 bottom
ON_LED3  [SMT-JUMPER_2_NC_TRACE_SILK]  137.47,8.55 180 bottom
ON_LED4  [SMT-JUMPER_2_NC_TRACE_SILK]  21.65,47.16 180 bottom
ON_LED5  [SMT-JUMPER_2_NC_TRACE_SILK]  60.25,47.16 180 bottom
ON_LED6  [SMT-JUMPER_2_NC_TRACE_SILK]  98.86,47.16 180 bottom
ON_LED7  [SMT-JUMPER_2_NC_TRACE_SILK]  137.47,47.16 180 bottom
ON_LED8  [SMT-JUMPER_2_NC_TRACE_SILK]  21.65,85.77 180 bottom
ON_LED9  [SMT-JUMPER_2_NC_TRACE_SILK]  60.25,85.77 180 bottom
ON_LED10  [SMT-JUMPER_2_NC_TRACE_SILK]  98.86,85.77 180 bottom
ON_LED11  [SMT-JUMPER_2_NC_TRACE_SILK]  137.47,85.77 180 bottom
POWER  Red  [LED-0603]  40.51,36.07 0 top
POWER1  Red  [LED-0603]  79.12,36.07 0 top
POWER2  Red  [LED-0603]  117.73,36.07 0 top
POWER3  Red  [LED-0603]  156.34,36.07 0 top
POWER4  Red  [LED-0603]  40.51,74.68 0 top
POWER5  Red  [LED-0603]  79.12,74.68 0 top
POWER6  Red  [LED-0603]  117.73,74.68 0 top
POWER7  Red  [LED-0603]  156.34,74.68 0 top
POWER8  Red  [LED-0603]  40.51,113.28 0 top
POWER9  Red  [LED-0603]  79.12,113.28 0 top
POWER10  Red  [LED-0603]  117.73,113.28 0 top
POWER11  Red  [LED-0603]  156.34,113.28 0 top
PWR_LED  [SMT-JUMPER_2_NC_TRACE_SILK]  36.24,39.96 270 bottom
PWR_LED1  [SMT-JUMPER_2_NC_TRACE_SILK]  74.84,39.96 270 bottom
PWR_LED2  [SMT-JUMPER_2_NC_TRACE_SILK]  113.45,39.96 270 bottom
PWR_LED3  [SMT-JUMPER_2_NC_TRACE_SILK]  152.06,39.96 270 bottom
PWR_LED4  [SMT-JUMPER_2_NC_TRACE_SILK]  36.24,78.57 270 bottom
PWR_LED5  [SMT-JUMPER_2_NC_TRACE_SILK]  74.84,78.57 270 bottom
PWR_LED6  [SMT-JUMPER_2_NC_TRACE_SILK]  113.45,78.57 270 bottom
PWR_LED7  [SMT-JUMPER_2_NC_TRACE_SILK]  152.06,78.57 270 bottom
PWR_LED8  [SMT-JUMPER_2_NC_TRACE_SILK]  36.24,117.18 270 bottom
PWR_LED9  [SMT-JUMPER_2_NC_TRACE_SILK]  74.84,117.18 270 bottom
PWR_LED10  [SMT-JUMPER_2_NC_TRACE_SILK]  113.45,117.18 270 bottom
PWR_LED11  [SMT-JUMPER_2_NC_TRACE_SILK]  152.06,117.18 270 bottom
Q1  600mA/40V  [SOT23-3]  27.18,28.45 180 top
Q2  100A/100V/6.8mΩ  [TO-263/D2PAK]  29.72,16.51 180 top
Q3  100A/100V/6.8mΩ  [TO-263/D2PAK]  68.33,16.51 180 top
Q4  600mA/40V  [SOT23-3]  65.79,28.45 180 top
Q5  100A/100V/6.8mΩ  [TO-263/D2PAK]  106.93,16.51 180 top
Q6  600mA/40V  [SOT23-3]  104.39,28.45 180 top
Q7  100A/100V/6.8mΩ  [TO-263/D2PAK]  145.54,16.51 180 top
Q8  600mA/40V  [SOT23-3]  143,28.45 180 top
Q9  100A/100V/6.8mΩ  [TO-263/D2PAK]  29.72,55.12 180 top
Q10  600mA/40V  [SOT23-3]  27.18,67.06 180 top
Q11  100A/100V/6.8mΩ  [TO-263/D2PAK]  68.33,55.12 180 top
Q12  600mA/40V  [SOT23-3]  65.79,67.06 180 top
Q13  100A/100V/6.8mΩ  [TO-263/D2PAK]  106.93,55.12 180 top
Q14  600mA/40V  [SOT23-3]  104.39,67.06 180 top
Q15  100A/100V/6.8mΩ  [TO-263/D2PAK]  145.54,55.12 180 top
Q16  600mA/40V  [SOT23-3]  143,67.06 180 top
Q17  100A/100V/6.8mΩ  [TO-263/D2PAK]  29.72,93.73 180 top
Q18  600mA/40V  [SOT23-3]  27.18,105.66 180 top
Q19  100A/100V/6.8mΩ  [TO-263/D2PAK]  68.33,93.73 180 top
Q20  600mA/40V  [SOT23-3]  65.79,105.66 180 top
Q21  100A/100V/6.8mΩ  [TO-263/D2PAK]  106.93,93.73 180 top
Q22  600mA/40V  [SOT23-3]  104.39,105.66 180 top
Q23  100A/100V/6.8mΩ  [TO-263/D2PAK]  145.54,93.73 180 top
Q24  600mA/40V  [SOT23-3]  143,105.66 180 top
R1  4.7k  [0603]  40.5,37.73 180 top
R2  4.7k  [0603]  17.01,9.38 270 top
R3  4.7k  [0603]  55.62,9.38 270 top
R4  100k  [0603]  66.37,42.31 0 top
R5  30.1k  [0603]  63.75,41.41 90 top
R6  10k  [0603]  70.87,28.45 270 top
R7  100k  [0603]  27.76,42.31 0 top
R8  30.1k  [0603]  25.14,41.41 90 top
R9  10k  [0603]  62.61,28.45 90 top
R10  10k  [0603]  32.26,28.45 270 top
R11  10k  [0603]  24,28.45 90 top
R12  1k  [0603]  30.35,28.45 270 top
R13  1k  [0603]  68.96,28.45 270 top
R14  4.7k  [0603]  79.11,37.73 180 top
R15  4.7k  [0603]  94.22,9.38 270 top
R16  100k  [0603]  104.98,42.31 0 top
R17  30.1k  [0603]  102.36,41.41 90 top
R18  10k  [0603]  109.47,28.45 270 top
R19  10k  [0603]  101.22,28.45 90 top
R20  1k  [0603]  107.57,28.45 270 top
R21  4.7k  [0603]  117.72,37.73 180 top
R22  4.7k  [0603]  132.83,9.38 270 top
R23  100k  [0603]  143.59,42.31 0 top
R24  30.1k  [0603]  140.96,41.41 90 top
R25  10k  [0603]  148.08,28.45 270 top
R26  10k  [0603]  139.83,28.45 90 top
R27  1k  [0603]  146.18,28.45 270 top
R28  4.7k  [0603]  156.32,37.73 180 top
R29  4.7k  [0603]  17.01,47.99 270 top
R30  100k  [0603]  27.76,80.92 0 top
R31  30.1k  [0603]  25.14,80.02 90 top
R32  10k  [0603]  32.26,67.06 270 top
R33  10k  [0603]  24,67.06 90 top
R34  1k  [0603]  30.35,67.06 270 top
R35  4.7k  [0603]  40.5,76.34 180 top
R36  4.7k  [0603]  55.62,47.99 270 top
R37  100k  [0603]  66.37,80.92 0 top
R38  30.1k  [0603]  63.75,80.02 90 top
R39  10k  [0603]  70.87,67.06 270 top
R40  10k  [0603]  62.61,67.06 90 top
R41  1k  [0603]  68.96,67.06 270 top
R42  4.7k  [0603]  79.11,76.34 180 top
R43  4.7k  [0603]  94.22,47.99 270 top
R44  100k  [0603]  104.98,80.92 0 top
R45  30.1k  [0603]  102.36,80.02 90 top
R46  10k  [0603]  109.47,67.06 270 top
R47  10k  [0603]  101.22,67.06 90 top
R48  1k  [0603]  107.57,67.06 270 top
R49  4.7k  [0603]  117.72,76.34 180 top
R50  4.7k  [0603]  132.83,47.99 270 top
R51  100k  [0603]  143.59,80.92 0 top
R52  30.1k  [0603]  140.96,80.02 90 top
R53  10k  [0603]  148.08,67.06 270 top
R54  10k  [0603]  139.83,67.06 90 top
R55  1k  [0603]  146.18,67.06 270 top
R56  4.7k  [0603]  156.32,76.34 180 top
R57  4.7k  [0603]  17.01,86.59 270 top
R58  100k  [0603]  27.76,119.53 0 top
R59  30.1k  [0603]  25.14,118.62 90 top
R60  10k  [0603]  32.26,105.66 270 top
R61  10k  [0603]  24,105.66 90 top
R62  1k  [0603]  30.35,105.66 270 top
R63  4.7k  [0603]  40.5,114.95 180 top
R64  4.7k  [0603]  55.62,86.59 270 top
R65  100k  [0603]  66.37,119.53 0 top
R66  30.1k  [0603]  63.75,118.62 90 top
R67  10k  [0603]  70.87,105.66 270 top
R68  10k  [0603]  62.61,105.66 90 top
R69  1k  [0603]  68.96,105.66 270 top
R70  4.7k  [0603]  79.11,114.95 180 top
R71  4.7k  [0603]  94.22,86.59 270 top
R72  100k  [0603]  104.98,119.53 0 top
R73  30.1k  [0603]  102.36,118.62 90 top
R74  10k  [0603]  109.47,105.66 270 top
R75  10k  [0603]  101.22,105.66 90 top
R76  1k  [0603]  107.57,105.66 270 top
R77  4.7k  [0603]  117.72,114.95 180 top
R78  4.7k  [0603]  132.83,86.59 270 top
R79  100k  [0603]  143.59,119.53 0 top
R80  30.1k  [0603]  140.96,118.62 90 top
R81  10k  [0603]  148.08,105.66 270 top
R82  10k  [0603]  139.83,105.66 90 top
R83  1k  [0603]  146.18,105.66 270 top
R84  4.7k  [0603]  156.32,114.95 180 top
U1  LMR14203  [SOT23-6]  27.81,38.61 180 top
U2  LMR14203  [SOT23-6]  66.42,38.61 180 top
U3  LMR14203  [SOT23-6]  105.03,38.61 180 top
U4  LMR14203  [SOT23-6]  143.64,38.61 180 top
U5  LMR14203  [SOT23-6]  27.81,77.22 180 top
U6  LMR14203  [SOT23-6]  66.42,77.22 180 top
U7  LMR14203  [SOT23-6]  105.03,77.22 180 top
U8  LMR14203  [SOT23-6]  143.64,77.22 180 top
U9  LMR14203  [SOT23-6]  27.81,115.82 180 top
U10  LMR14203  [SOT23-6]  66.42,115.82 180 top
U11  LMR14203  [SOT23-6]  105.03,115.82 180 top
U12  LMR14203  [SOT23-6]  143.64,115.82 180 top
U$1  [#LOAD#7]  11.73,12.43 0 top
U$2  [MOSFET0]  40.21,18.66 0 top
U$3  [#VIN#8]  8.71,37.54 0 top
U$4  [#GND#0]  35.43,30.99 0 top
U$5  [POLARITY_MARKING_CENTER_POSITIVE#JPG]  55.71,40.2 0 top
U$6  [#GND#0]  20.86,43.66 0 top
U$7  [#0]  46.74,20.32 270 top
U$8  [SFE_LOGO_FLAME_.2]  37.44,40.51 0 top
U$9  [POWER1]  40.21,17.43 0 top
U$10  [#0]  8.13,20.32 270 top
U$11  [#1]  8.13,13.21 270 top
U$12  [#GND#0]  41.02,30.99 0 bottom
U$13  [SWITCH2]  40.01,16.24 0 top
U$14  [#3V3#3]  35.56,25.91 0 top
U$15  [#PWR_LED#11]  31.21,39.97 0 bottom
U$16  [#ON_LED#13]  26.28,8.51 0 bottom
U$17  [#MEAS#14]  11.94,24.92 0 bottom
U$18  [4#5_12V5]  17.17,41.81 0 top
U$19  [LOAD0]  10.43,17.16 90 bottom
U$20  [#0]  8.13,20.32 270 bottom
U$21  [#VIN#8]  13.36,43.64 0 top
U$22  [#1]  8.13,13.21 270 bottom
U$23  [LOW0]  38.29,13.53 0 top
U$24  [MOSFET_0]  25.02,29.2 0 bottom
U$25  [POWER_1]  25.26,27.07 0 bottom
U$26  [SWITCH_2]  25.33,24.73 0 bottom
U$27  [#3V3#3]  41.02,25.91 0 bottom
U$28  [##CTL##1]  35.56,28.45 0 top
U$29  [POLARITY_MARKING_CENTER_POSITIVE#JPG]  17.1,40.2 0 top
U$30  [##CTL##2]  41.02,28.45 0 bottom
U$31  [#VCC#4]  35.43,23.37 0 top
U$32  [#VCC#4]  41.02,23.37 0 bottom
U$33  [SIDE0]  42.1,13.53 0 top
U$34  [PWR9]  40.63,34.9 0 top
U$35  [ON10]  20.71,9.17 0 top
U$36  [#VIN#8]  15.75,41.4 90 bottom
U$37  [#GND#0]  18.3,41.14 90 bottom
U$38  [#MEAS#14]  16.4,23.41 0 top
U$39  [BUCK5]  29.5,21.86 0 bottom
U$40  [REGULATOR6]  23.82,21.81 0 bottom
U$41  [#_BUCK_REG7]  40.32,14.93 0 top
U$42  [AND8]  25.67,23.16 0 bottom
U$43  [LOW0]  27.9,20.48 0 bottom
U$44  [SIDE0]  24.09,20.48 0 bottom
U$45  [#1]  46.74,13.21 270 top
U$46  [LOAD0]  49.04,17.16 90 bottom
U$47  [#0]  46.74,20.32 270 bottom
U$48  [#1]  46.74,13.21 270 bottom
U$49  [MOSFET0]  78.82,18.66 0 top
U$50  [POWER1]  78.82,17.43 0 top
U$51  [SWITCH2]  78.62,16.24 0 top
U$52  [MOSFET_0]  63.63,29.2 0 bottom
U$53  [POWER_1]  63.87,27.07 0 bottom
U$54  [SWITCH_2]  63.93,24.73 0 bottom
U$55  [#GND#0]  74.04,30.99 0 top
U$56  [#GND#0]  79.63,30.99 0 bottom
U$57  [##CTL##1]  74.17,28.45 0 top
U$58  [##CTL##2]  79.63,28.45 0 bottom
U$59  [#3V3#3]  74.17,25.91 0 top
U$60  [#3V3#3]  79.63,25.91 0 bottom
U$61  [#VCC#4]  74.04,23.37 0 top
U$62  [#VCC#4]  79.63,23.37 0 bottom
U$63  [#LOAD#7]  50.34,12.43 0 top
U$64  [#VIN#8]  47.32,37.54 0 top
U$65  [SFE_LOGO_FLAME_.2]  76.05,40.51 0 top
U$66  [#PWR_LED#11]  69.82,39.97 0 bottom
U$67  [#ON_LED#13]  64.89,8.51 0 bottom
U$68  [#MEAS#14]  50.55,24.92 0 bottom
U$69  [LOW0]  76.9,13.53 0 top
U$70  [SIDE0]  80.71,13.53 0 top
U$71  [#VIN#8]  54.35,41.4 90 bottom
U$72  [#GND#0]  56.9,41.14 90 bottom
U$73  [4#5_12V5]  55.78,41.81 0 top
U$74  [#GND#0]  59.47,43.66 0 top
U$75  [#VIN#8]  51.97,43.64 0 top
U$76  [#MEAS#14]  55,23.41 0 top
U$77  [BUCK5]  68.11,21.86 0 bottom
U$78  [REGULATOR6]  62.43,21.81 0 bottom
U$79  [#_BUCK_REG7]  78.93,14.93 0 top
U$80  [AND8]  64.28,23.16 0 bottom
U$81  [LOW0]  66.51,20.48 0 bottom
U$82  [SIDE0]  62.7,20.48 0 bottom
U$83  [PWR9]  79.24,34.9 0 top
U$84  [ON10]  59.32,9.17 0 top
U$85  [POLARITY_MARKING_CENTER_POSITIVE#JPG]  94.32,40.2 0 top
U$86  [#0]  85.34,20.32 270 top
U$87  [#1]  85.34,13.21 270 top
U$88  [LOAD0]  87.65,17.16 90 bottom
U$89  [#0]  85.34,20.32 270 bottom
U$90  [#1]  85.34,13.21 270 bottom
U$91  [MOSFET0]  117.43,18.66 0 top
U$92  [POWER1]  117.43,17.43 0 top
U$93  [SWITCH2]  117.23,16.24 0 top
U$94  [MOSFET_0]  102.24,29.2 0 bottom
U$95  [POWER_1]  102.48,27.07 0 bottom
U$96  [SWITCH_2]  102.54,24.73 0 bottom
U$97  [#GND#0]  112.65,30.99 0 top
U$98  [#GND#0]  118.24,30.99 0 bottom
U$99  [##CTL##1]  112.78,28.45 0 top
U$100  [##CTL##2]  118.24,28.45 0 bottom
U$101  [#3V3#3]  112.78,25.91 0 top
U$102  [#3V3#3]  118.24,25.91 0 bottom
U$103  [#VCC#4]  112.65,23.37 0 top
U$104  [#VCC#4]  118.24,23.37 0 bottom
U$105  [#LOAD#7]  88.94,12.43 0 top
U$106  [#VIN#8]  85.93,37.54 0 top
U$107  [SFE_LOGO_FLAME_.2]  114.66,40.51 0 top
U$108  [#PWR_LED#11]  108.42,39.97 0 bottom
U$109  [#ON_LED#13]  103.49,8.51 0 bottom
U$110  [#MEAS#14]  89.16,24.92 0 bottom
U$111  [LOW0]  115.5,13.53 0 top
U$112  [SIDE0]  119.31,13.53 0 top
U$113  [#VIN#8]  92.96,41.4 90 bottom
U$114  [#GND#0]  95.51,41.14 90 bottom
U$115  [4#5_12V5]  94.38,41.81 0 top
U$116  [#GND#0]  98.08,43.66 0 top
U$117  [#VIN#8]  90.58,43.64 0 top
U$118  [#MEAS#14]  93.61,23.41 0 top
U$119  [BUCK5]  106.72,21.86 0 bottom
U$120  [REGULATOR6]  101.04,21.81 0 bottom
U$121  [#_BUCK_REG7]  117.54,14.93 0 top
U$122  [AND8]  102.89,23.16 0 bottom
U$123  [LOW0]  105.12,20.48 0 bottom
U$124  [SIDE0]  101.31,20.48 0 bottom
U$125  [PWR9]  117.84,34.9 0 top
U$126  [ON10]  97.92,9.17 0 top
U$127  [POLARITY_MARKING_CENTER_POSITIVE#JPG]  132.92,40.2 0 top
U$128  [#0]  123.95,20.32 270 top
U$129  [#1]  123.95,13.21 270 top
U$130  [LOAD0]  126.26,17.16 90 bottom
U$131  [#0]  123.95,20.32 270 bottom
U$132  [#1]  123.95,13.21 270 bottom
U$133  [MOSFET0]  156.03,18.66 0 top
U$134  [POWER1]  156.04,17.43 0 top
U$135  [SWITCH2]  155.84,16.24 0 top
U$136  [MOSFET_0]  140.85,29.2 0 bottom
U$137  [POWER_1]  141.09,27.07 0 bottom
U$138  [SWITCH_2]  141.15,24.73 0 bottom
U$139  [#GND#0]  151.26,30.99 0 top
U$140  [#GND#0]  156.84,30.99 0 bottom
U$141  [##CTL##1]  151.38,28.45 0 top
U$142  [##CTL##2]  156.84,28.45 0 bottom
U$143  [#3V3#3]  151.38,25.91 0 top
U$144  [#3V3#3]  156.84,25.91 0 bottom
U$145  [#VCC#4]  151.26,23.37 0 top
U$146  [#VCC#4]  156.84,23.37 0 bottom
U$147  [#LOAD#7]  127.55,12.43 0 top
U$148  [#VIN#8]  124.53,37.54 0 top
U$149  [SFE_LOGO_FLAME_.2]  153.27,40.51 0 top
U$150  [#PWR_LED#11]  147.03,39.97 0 bottom
U$151  [#ON_LED#13]  142.1,8.51 0 bottom
U$152  [#MEAS#14]  127.77,24.92 0 bottom
U$153  [LOW0]  154.11,13.53 0 top
U$154  [SIDE0]  157.92,13.53 0 top
U$155  [#VIN#8]  131.57,41.4 90 bottom
U$156  [#GND#0]  134.12,41.14 90 bottom
U$157  [4#5_12V5]  132.99,41.81 0 top
U$158  [#GND#0]  136.69,43.66 0 top
U$159  [#VIN#8]  129.19,43.64 0 top
U$160  [#MEAS#14]  132.22,23.41 0 top
U$161  [BUCK5]  145.33,21.86 0 bottom
U$162  [REGULATOR6]  139.64,21.81 0 bottom
U$163  [#_BUCK_REG7]  156.14,14.93 0 top
U$164  [AND8]  141.5,23.16 0 bottom
U$165  [LOW0]  143.73,20.48 0 bottom
U$166  [SIDE0]  139.92,20.48 0 bottom
U$167  [PWR9]  156.45,34.9 0 top
U$168  [ON10]  136.53,9.17 0 top
U$169  [POLARITY_MARKING_CENTER_POSITIVE#JPG]  17.1,78.8 0 top
U$170  [#0]  8.13,58.93 270 top
U$171  [#1]  8.13,51.82 270 top
U$172  [LOAD0]  10.43,55.77 90 bottom
U$173  [#0]  8.13,58.93 270 bottom
U$174  [#1]  8.13,51.82 270 bottom
U$175  [MOSFET0]  40.21,57.27 0 top
U$176  [POWER1]  40.21,56.04 0 top
U$177  [SWITCH2]  40.01,54.85 0 top
U$178  [MOSFET_0]  25.02,67.81 0 bottom
U$179  [POWER_1]  25.26,65.68 0 bottom
U$180  [SWITCH_2]  25.33,63.33 0 bottom
U$181  [#GND#0]  35.43,69.6 0 top
U$182  [#GND#0]  41.02,69.6 0 bottom
U$183  [##CTL##1]  35.56,67.06 0 top
U$184  [##CTL##2]  41.02,67.06 0 bottom
U$185  [#3V3#3]  35.56,64.52 0 top
U$186  [#3V3#3]  41.02,64.52 0 bottom
U$187  [#VCC#4]  35.43,61.98 0 top
U$188  [#VCC#4]  41.02,61.98 0 bottom
U$189  [#LOAD#7]  11.73,51.03 0 top
U$190  [#VIN#8]  8.71,76.14 0 top
U$191  [SFE_LOGO_FLAME_.2]  37.44,79.12 0 top
U$192  [#PWR_LED#11]  31.21,78.57 0 bottom
U$193  [#ON_LED#13]  26.28,47.12 0 bottom
U$194  [#MEAS#14]  11.94,63.53 0 bottom
U$195  [LOW0]  38.29,52.14 0 top
U$196  [SIDE0]  42.1,52.14 0 top
U$197  [#VIN#8]  15.75,80.01 90 bottom
U$198  [#GND#0]  18.3,79.75 90 bottom
U$199  [4#5_12V5]  17.17,80.42 0 top
U$200  [#GND#0]  20.86,82.27 0 top
U$201  [#VIN#8]  13.36,82.25 0 top
U$202  [#MEAS#14]  16.4,62.02 0 top
U$203  [BUCK5]  29.5,60.47 0 bottom
U$204  [REGULATOR6]  23.82,60.42 0 bottom
U$205  [#_BUCK_REG7]  40.32,53.54 0 top
U$206  [AND8]  25.67,61.77 0 bottom
U$207  [LOW0]  27.9,59.09 0 bottom
U$208  [SIDE0]  24.09,59.09 0 bottom
U$209  [PWR9]  40.63,73.51 0 top
U$210  [ON10]  20.71,47.77 0 top
U$211  [POLARITY_MARKING_CENTER_POSITIVE#JPG]  55.71,78.8 0 top
U$212  [#0]  46.74,58.93 270 top
U$213  [#1]  46.74,51.82 270 top
U$214  [LOAD0]  49.04,55.77 90 bottom
U$215  [#0]  46.74,58.93 270 bottom
U$216  [#1]  46.74,51.82 270 bottom
U$217  [MOSFET0]  78.82,57.27 0 top
U$218  [POWER1]  78.82,56.04 0 top
U$219  [SWITCH2]  78.62,54.85 0 top
U$220  [MOSFET_0]  63.63,67.81 0 bottom
U$221  [POWER_1]  63.87,65.68 0 bottom
U$222  [SWITCH_2]  63.93,63.33 0 bottom
U$223  [#GND#0]  74.04,69.6 0 top
U$224  [#GND#0]  79.63,69.6 0 bottom
U$225  [##CTL##1]  74.17,67.06 0 top
U$226  [##CTL##2]  79.63,67.06 0 bottom
U$227  [#3V3#3]  74.17,64.52 0 top
U$228  [#3V3#3]  79.63,64.52 0 bottom
U$229  [#VCC#4]  74.04,61.98 0 top
U$230  [#VCC#4]  79.63,61.98 0 bottom
U$231  [#LOAD#7]  50.34,51.03 0 top
U$232  [#VIN#8]  47.32,76.14 0 top
U$233  [SFE_LOGO_FLAME_.2]  76.05,79.12 0 top
U$234  [#PWR_LED#11]  69.82,78.57 0 bottom
U$235  [#ON_LED#13]  64.89,47.12 0 bottom
U$236  [#MEAS#14]  50.55,63.53 0 bottom
U$237  [LOW0]  76.9,52.14 0 top
U$238  [SIDE0]  80.71,52.14 0 top
U$239  [#VIN#8]  54.35,80.01 90 bottom
U$240  [#GND#0]  56.9,79.75 90 bottom
U$241  [4#5_12V5]  55.78,80.42 0 top
U$242  [#GND#0]  59.47,82.27 0 top
U$243  [#VIN#8]  51.97,82.25 0 top
U$244  [#MEAS#14]  55,62.02 0 top
U$245  [BUCK5]  68.11,60.47 0 bottom
U$246  [REGULATOR6]  62.43,60.42 0 bottom
U$247  [#_BUCK_REG7]  78.93,53.54 0 top
U$248  [AND8]  64.28,61.77 0 bottom
U$249  [LOW0]  66.51,59.09 0 bottom
U$250  [SIDE0]  62.7,59.09 0 bottom
U$251  [PWR9]  79.24,73.51 0 top
U$252  [ON10]  59.32,47.77 0 top
U$253  [POLARITY_MARKING_CENTER_POSITIVE#JPG]  94.32,78.8 0 top
U$254  [#0]  85.34,58.93 270 top
U$255  [#1]  85.34,51.82 270 top
U$256  [LOAD0]  87.65,55.77 90 bottom
U$257  [#0]  85.34,58.93 270 bottom
U$258  [#1]  85.34,51.82 270 bottom
U$259  [MOSFET0]  117.43,57.27 0 top
U$260  [POWER1]  117.43,56.04 0 top
U$261  [SWITCH2]  117.23,54.85 0 top
U$262  [MOSFET_0]  102.24,67.81 0 bottom
U$263  [POWER_1]  102.48,65.68 0 bottom
U$264  [SWITCH_2]  102.54,63.33 0 bottom
U$265  [#GND#0]  112.65,69.6 0 top
U$266  [#GND#0]  118.24,69.6 0 bottom
U$267  [##CTL##1]  112.78,67.06 0 top
U$268  [##CTL##2]  118.24,67.06 0 bottom
U$269  [#3V3#3]  112.78,64.52 0 top
U$270  [#3V3#3]  118.24,64.52 0 bottom
U$271  [#VCC#4]  112.65,61.98 0 top
U$272  [#VCC#4]  118.24,61.98 0 bottom
U$273  [#LOAD#7]  88.94,51.03 0 top
U$274  [#VIN#8]  85.93,76.14 0 top
U$275  [SFE_LOGO_FLAME_.2]  114.66,79.12 0 top
U$276  [#PWR_LED#11]  108.42,78.57 0 bottom
U$277  [#ON_LED#13]  103.49,47.12 0 bottom
U$278  [#MEAS#14]  89.16,63.53 0 bottom
U$279  [LOW0]  115.5,52.14 0 top
U$280  [SIDE0]  119.31,52.14 0 top
U$281  [#VIN#8]  92.96,80.01 90 bottom
U$282  [#GND#0]  95.51,79.75 90 bottom
U$283  [4#5_12V5]  94.38,80.42 0 top
U$284  [#GND#0]  98.08,82.27 0 top
U$285  [#VIN#8]  90.58,82.25 0 top
U$286  [#MEAS#14]  93.61,62.02 0 top
U$287  [BUCK5]  106.72,60.47 0 bottom
U$288  [REGULATOR6]  101.04,60.42 0 bottom
U$289  [#_BUCK_REG7]  117.54,53.54 0 top
U$290  [AND8]  102.89,61.77 0 bottom
U$291  [LOW0]  105.12,59.09 0 bottom
U$292  [SIDE0]  101.31,59.09 0 bottom
U$293  [PWR9]  117.84,73.51 0 top
U$294  [ON10]  97.92,47.77 0 top
U$295  [POLARITY_MARKING_CENTER_POSITIVE#JPG]  132.92,78.8 0 top
U$296  [#0]  123.95,58.93 270 top
U$297  [#1]  123.95,51.82 270 top
U$298  [LOAD0]  126.26,55.77 90 bottom
U$299  [#0]  123.95,58.93 270 bottom
U$300  [#1]  123.95,51.82 270 bottom
U$301  [MOSFET0]  156.03,57.27 0 top
U$302  [POWER1]  156.04,56.04 0 top
U$303  [SWITCH2]  155.84,54.85 0 top
U$304  [MOSFET_0]  140.85,67.81 0 bottom
U$305  [POWER_1]  141.09,65.68 0 bottom
U$306  [SWITCH_2]  141.15,63.33 0 bottom
U$307  [#GND#0]  151.26,69.6 0 top
U$308  [#GND#0]  156.84,69.6 0 bottom
U$309  [##CTL##1]  151.38,67.06 0 top
U$310  [##CTL##2]  156.84,67.06 0 bottom
U$311  [#3V3#3]  151.38,64.52 0 top
U$312  [#3V3#3]  156.84,64.52 0 bottom
U$313  [#VCC#4]  151.26,61.98 0 top
U$314  [#VCC#4]  156.84,61.98 0 bottom
U$315  [#LOAD#7]  127.55,51.03 0 top
U$316  [#VIN#8]  124.53,76.14 0 top
U$317  [SFE_LOGO_FLAME_.2]  153.27,79.12 0 top
U$318  [#PWR_LED#11]  147.03,78.57 0 bottom
U$319  [#ON_LED#13]  142.1,47.12 0 bottom
U$320  [#MEAS#14]  127.77,63.53 0 bottom
U$321  [LOW0]  154.11,52.14 0 top
U$322  [SIDE0]  157.92,52.14 0 top
U$323  [#VIN#8]  131.57,80.01 90 bottom
U$324  [#GND#0]  134.12,79.75 90 bottom
U$325  [4#5_12V5]  132.99,80.42 0 top
U$326  [#GND#0]  136.69,82.27 0 top
U$327  [#VIN#8]  129.19,82.25 0 top
U$328  [#MEAS#14]  132.22,62.02 0 top
U$329  [BUCK5]  145.33,60.47 0 bottom
U$330  [REGULATOR6]  139.64,60.42 0 bottom
U$331  [#_BUCK_REG7]  156.14,53.54 0 top
U$332  [AND8]  141.5,61.77 0 bottom
U$333  [LOW0]  143.73,59.09 0 bottom
U$334  [SIDE0]  139.92,59.09 0 bottom
U$335  [PWR9]  156.45,73.51 0 top
U$336  [ON10]  136.53,47.77 0 top
U$337  [POLARITY_MARKING_CENTER_POSITIVE#JPG]  17.1,117.41 0 top
U$338  [#0]  8.13,97.54 270 top
U$339  [#1]  8.13,90.42 270 top
U$340  [LOAD0]  10.43,94.37 90 bottom
U$341  [#0]  8.13,97.54 270 bottom
U$342  [#1]  8.13,90.42 270 bottom
U$343  [MOSFET0]  40.21,95.88 0 top
U$344  [POWER1]  40.21,94.65 0 top
U$345  [SWITCH2]  40.01,93.46 0 top
U$346  [MOSFET_0]  25.02,106.41 0 bottom
U$347  [POWER_1]  25.26,104.28 0 bottom
U$348  [SWITCH_2]  25.33,101.94 0 bottom
U$349  [#GND#0]  35.43,108.2 0 top
U$350  [#GND#0]  41.02,108.2 0 bottom
U$351  [##CTL##1]  35.56,105.66 0 top
U$352  [##CTL##2]  41.02,105.66 0 bottom
U$353  [#3V3#3]  35.56,103.12 0 top
U$354  [#3V3#3]  41.02,103.12 0 bottom
U$355  [#VCC#4]  35.43,100.58 0 top
U$356  [#VCC#4]  41.02,100.58 0 bottom
U$357  [#LOAD#7]  11.73,89.64 0 top
U$358  [#VIN#8]  8.71,114.75 0 top
U$359  [SFE_LOGO_FLAME_.2]  37.44,117.73 0 top
U$360  [#PWR_LED#11]  31.21,117.18 0 bottom
U$361  [#ON_LED#13]  26.28,85.73 0 bottom
U$362  [#MEAS#14]  11.94,102.13 0 bottom
U$363  [LOW0]  38.29,90.75 0 top
U$364  [SIDE0]  42.1,90.75 0 top
U$365  [#VIN#8]  15.75,118.62 90 bottom
U$366  [#GND#0]  18.3,118.36 90 bottom
U$367  [4#5_12V5]  17.17,119.03 0 top
U$368  [#GND#0]  20.86,120.88 0 top
U$369  [#VIN#8]  13.36,120.86 0 top
U$370  [#MEAS#14]  16.4,100.62 0 top
U$371  [BUCK5]  29.5,99.08 0 bottom
U$372  [REGULATOR6]  23.82,99.03 0 bottom
U$373  [#_BUCK_REG7]  40.32,92.15 0 top
U$374  [AND8]  25.67,100.37 0 bottom
U$375  [LOW0]  27.9,97.69 0 bottom
U$376  [SIDE0]  24.09,97.69 0 bottom
U$377  [PWR9]  40.63,112.11 0 top
U$378  [ON10]  20.71,86.38 0 top
U$379  [POLARITY_MARKING_CENTER_POSITIVE#JPG]  55.71,117.41 0 top
U$380  [#0]  46.74,97.54 270 top
U$381  [#1]  46.74,90.42 270 top
U$382  [LOAD0]  49.04,94.37 90 bottom
U$383  [#0]  46.74,97.54 270 bottom
U$384  [#1]  46.74,90.42 270 bottom
U$385  [MOSFET0]  78.82,95.88 0 top
U$386  [POWER1]  78.82,94.65 0 top
U$387  [SWITCH2]  78.62,93.46 0 top
U$388  [MOSFET_0]  63.63,106.41 0 bottom
U$389  [POWER_1]  63.87,104.28 0 bottom
U$390  [SWITCH_2]  63.93,101.94 0 bottom
U$391  [#GND#0]  74.04,108.2 0 top
U$392  [#GND#0]  79.63,108.2 0 bottom
U$393  [##CTL##1]  74.17,105.66 0 top
U$394  [##CTL##2]  79.63,105.66 0 bottom
U$395  [#3V3#3]  74.17,103.12 0 top
U$396  [#3V3#3]  79.63,103.12 0 bottom
U$397  [#VCC#4]  74.04,100.58 0 top
U$398  [#VCC#4]  79.63,100.58 0 bottom
U$399  [#LOAD#7]  50.34,89.64 0 top
U$400  [#VIN#8]  47.32,114.75 0 top
U$401  [SFE_LOGO_FLAME_.2]  76.05,117.73 0 top
U$402  [#PWR_LED#11]  69.82,117.18 0 bottom
U$403  [#ON_LED#13]  64.89,85.73 0 bottom
U$404  [#MEAS#14]  50.55,102.13 0 bottom
U$405  [LOW0]  76.9,90.75 0 top
U$406  [SIDE0]  80.71,90.75 0 top
U$407  [#VIN#8]  54.35,118.62 90 bottom
U$408  [#GND#0]  56.9,118.36 90 bottom
U$409  [4#5_12V5]  55.78,119.03 0 top
U$410  [#GND#0]  59.47,120.88 0 top
U$411  [#VIN#8]  51.97,120.86 0 top
U$412  [#MEAS#14]  55,100.62 0 top
U$413  [BUCK5]  68.11,99.08 0 bottom
U$414  [REGULATOR6]  62.43,99.03 0 bottom
U$415  [#_BUCK_REG7]  78.93,92.15 0 top
U$416  [AND8]  64.28,100.37 0 bottom
U$417  [LOW0]  66.51,97.69 0 bottom
U$418  [SIDE0]  62.7,97.69 0 bottom
U$419  [PWR9]  79.24,112.11 0 top
U$420  [ON10]  59.32,86.38 0 top
U$421  [POLARITY_MARKING_CENTER_POSITIVE#JPG]  94.32,117.41 0 top
U$422  [#0]  85.34,97.54 270 top
U$423  [#1]  85.34,90.42 270 top
U$424  [LOAD0]  87.65,94.37 90 bottom
U$425  [#0]  85.34,97.54 270 bottom
U$426  [#1]  85.34,90.42 270 bottom
U$427  [MOSFET0]  117.43,95.88 0 top
U$428  [POWER1]  117.43,94.65 0 top
U$429  [SWITCH2]  117.23,93.46 0 top
U$430  [MOSFET_0]  102.24,106.41 0 bottom
U$431  [POWER_1]  102.48,104.28 0 bottom
U$432  [SWITCH_2]  102.54,101.94 0 bottom
U$433  [#GND#0]  112.65,108.2 0 top
U$434  [#GND#0]  118.24,108.2 0 bottom
U$435  [##CTL##1]  112.78,105.66 0 top
U$436  [##CTL##2]  118.24,105.66 0 bottom
U$437  [#3V3#3]  112.78,103.12 0 top
U$438  [#3V3#3]  118.24,103.12 0 bottom
U$439  [#VCC#4]  112.65,100.58 0 top
U$440  [#VCC#4]  118.24,100.58 0 bottom
U$441  [#LOAD#7]  88.94,89.64 0 top
U$442  [#VIN#8]  85.93,114.75 0 top
U$443  [SFE_LOGO_FLAME_.2]  114.66,117.73 0 top
U$444  [#PWR_LED#11]  108.42,117.18 0 bottom
U$445  [#ON_LED#13]  103.49,85.73 0 bottom
U$446  [#MEAS#14]  89.16,102.13 0 bottom
U$447  [LOW0]  115.5,90.75 0 top
U$448  [SIDE0]  119.31,90.75 0 top
U$449  [#VIN#8]  92.96,118.62 90 bottom
U$450  [#GND#0]  95.51,118.36 90 bottom
U$451  [4#5_12V5]  94.38,119.03 0 top
U$452  [#GND#0]  98.08,120.88 0 top
U$453  [#VIN#8]  90.58,120.86 0 top
U$454  [#MEAS#14]  93.61,100.62 0 top
U$455  [BUCK5]  106.72,99.08 0 bottom
U$456  [REGULATOR6]  101.04,99.03 0 bottom
U$457  [#_BUCK_REG7]  117.54,92.15 0 top
U$458  [AND8]  102.89,100.37 0 bottom
U$459  [LOW0]  105.12,97.69 0 bottom
U$460  [SIDE0]  101.31,97.69 0 bottom
U$461  [PWR9]  117.84,112.11 0 top
U$462  [ON10]  97.92,86.38 0 top
U$463  [POLARITY_MARKING_CENTER_POSITIVE#JPG]  132.92,117.41 0 top
U$464  [#0]  123.95,97.54 270 top
U$465  [#1]  123.95,90.42 270 top
U$466  [LOAD0]  126.26,94.37 90 bottom
U$467  [#0]  123.95,97.54 270 bottom
U$468  [#1]  123.95,90.42 270 bottom
U$469  [MOSFET0]  156.03,95.88 0 top
U$470  [POWER1]  156.04,94.65 0 top
U$471  [SWITCH2]  155.84,93.46 0 top
U$472  [MOSFET_0]  140.85,106.41 0 bottom
U$473  [POWER_1]  141.09,104.28 0 bottom
U$474  [SWITCH_2]  141.15,101.94 0 bottom
U$475  [#GND#0]  151.26,108.2 0 top
U$476  [#GND#0]  156.84,108.2 0 bottom
U$477  [##CTL##1]  151.38,105.66 0 top
U$478  [##CTL##2]  156.84,105.66 0 bottom
U$479  [#3V3#3]  151.38,103.12 0 top
U$480  [#3V3#3]  156.84,103.12 0 bottom
U$481  [#VCC#4]  151.26,100.58 0 top
U$482  [#VCC#4]  156.84,100.58 0 bottom
U$483  [#LOAD#7]  127.55,89.64 0 top
U$484  [#VIN#8]  124.53,114.75 0 top
U$485  [SFE_LOGO_FLAME_.2]  153.27,117.73 0 top
U$486  [#PWR_LED#11]  147.03,117.18 0 bottom
U$487  [#ON_LED#13]  142.1,85.73 0 bottom
U$488  [#MEAS#14]  127.77,102.13 0 bottom
U$489  [LOW0]  154.11,90.75 0 top
U$490  [SIDE0]  157.92,90.75 0 top
U$491  [#VIN#8]  131.57,118.62 90 bottom
U$492  [#GND#0]  134.12,118.36 90 bottom
U$493  [4#5_12V5]  132.99,119.03 0 top
U$494  [#GND#0]  136.69,120.88 0 top
U$495  [#VIN#8]  129.19,120.86 0 top
U$496  [#MEAS#14]  132.22,100.62 0 top
U$497  [BUCK5]  145.33,99.08 0 bottom
U$498  [REGULATOR6]  139.64,99.03 0 bottom
U$499  [#_BUCK_REG7]  156.14,92.15 0 top
U$500  [AND8]  141.5,100.37 0 bottom
U$501  [LOW0]  143.73,97.69 0 bottom
U$502  [SIDE0]  139.92,97.69 0 bottom
U$503  [PWR9]  156.45,112.11 0 top
U$504  [ON10]  136.53,86.38 0 top

## Library data of the parts
C1 C7 C9 C16 C21 C26 C31 C36 C41 C46 C51 C56 = SparkFun-Capacitors; PROD_ID: CAP-13216
C2 C8 C12 C17 C22 C27 C32 C37 C42 C47 C52 C57 = SparkFun-Capacitors; PROD_ID: CAP-13854
C3 C5 C10 C11 C14 C15 C18 C19 C23 C24 C28 C29 C33 C34 C38 C39 C43 C44 C48 C49 C53 C54 C58 C59 = SparkFun-Capacitors; PROD_ID: CAP-08390
C4 C6 C13 C20 C25 C30 C35 C40 C45 C50 C55 C60 = SparkFun-Capacitors; PROD_ID: CAP-14106
D1-D24 = SparkFun-DiscreteSemi; PROD_ID: DIO-13919
E$1-E$4 FD1-FD48 LOGO1-LOGO24 U$8 U$65 U$107 U$149 U$191 U$233 U$275 U$317 U$359 U$401 U$443 U$485 = SparkFun-Aesthetics
E$5 E$6 = SparkFun-Retired
H1-H48 = SparkFun-Hardware
J1 J2 J6 J9 J10 J12 J15 J16 J18 J21 J22 J24 J27 J28 J30 J33 J34 J36 J39 J40 J42 J45 J46 J48 J51 J52 J54 J57 J58 J60 J63 J64 J66 J69 J70 J72 = SparkFun-Connectors
J3 J7 J13 J19 J25 J31 J37 J43 J49 J55 J61 J67 = SparkFun-Connectors; PROD_ID: CONN-08106; SF_ID: PRT-12748
J4 J11 J17 J23 J29 J35 J41 J47 J53 J59 J65 J71 = SparkFun-Connectors; PROD_ID: CONN-08511
J5 J8 J14 J20 J26 J32 J38 J44 J50 J56 J62 J68 = SparkFun-Connectors; PROD_ID: CONN-13512
L1-L12 = SparkFun-Coils; PROD_ID: NDUC-14107
MEAS MEAS1-MEAS11 ON_LED ON_LED1-ON_LED11 PWR_LED PWR_LED1-PWR_LED11 = SparkFun-Jumpers
ON ON1-ON11 POWER POWER1-POWER11 = SparkFun-LED; PROD_ID: DIO-17976
Q1 Q4 Q6 Q8 Q10 Q12 Q14 Q16 Q18 Q20 Q22 Q24 = SparkFun-DiscreteSemi; PROD_ID: TRANS-08049
Q2 Q3 Q5 Q7 Q9 Q11 Q13 Q15 Q17 Q19 Q21 Q23 = SparkFun-DiscreteSemi; PROD_ID: TRANS-12437
R1-R3 R14 R15 R21 R22 R28 R29 R35 R36 R42 R43 R49 R50 R56 R57 R63 R64 R70 R71 R77 R78 R84 = SparkFun-Resistors; PROD_ID: RES-07857
R4 R7 R16 R23 R30 R37 R44 R51 R58 R65 R72 R79 = SparkFun-Resistors; PROD_ID: RES-07828
R5 R8 R17 R24 R31 R38 R45 R52 R59 R66 R73 R80 = SparkFun-Resistors; PROD_ID: RES-14690
R6 R9-R11 R18 R19 R25 R26 R32 R33 R39 R40 R46 R47 R53 R54 R60 R61 R67 R68 R74 R75 R81 R82 = SparkFun-Resistors; PROD_ID: RES-00824
R12 R13 R20 R27 R34 R41 R48 R55 R62 R69 R76 R83 = SparkFun-Resistors; PROD_ID: RES-07856
U1-U12 = SparkFun-IC-Power; PROD_ID: IC-13918
U$1-U$4 U$6 U$7 U$9-U$28 U$30-U$64 U$66-U$84 U$86-U$106 U$108-U$126 U$128-U$148 U$150-U$168 U$170-U$190 U$192-U$210 U$212-U$232 U$234-U$252 U$254-U$274 U$276-U$294 U$296-U$316 U$318-U$336 U$338-U$358 U$360-U$378 U$380-U$400 U$402-U$420 U$422-U$442 U$444-U$462 U$464-U$484 U$486-U$504 = output
U$5 U$29 U$85 U$127 U$169 U$211 U$253 U$295 U$337 U$379 U$421 U$463 = Polarity_marking_center_positive#jpg